# Altium PCB Twintig-FCC-Metacarpal.PcbDoc
Units mm, origin at the board's own origin, x right, y up, seen from the top; angles counter-clockwise.
Board outline 15 x 10 mm, 2 copper layers (Top Copper, Bottom Copper), stack 0.32 mm thick; 2 components, 20 nets, 44 pads, 20 vias.
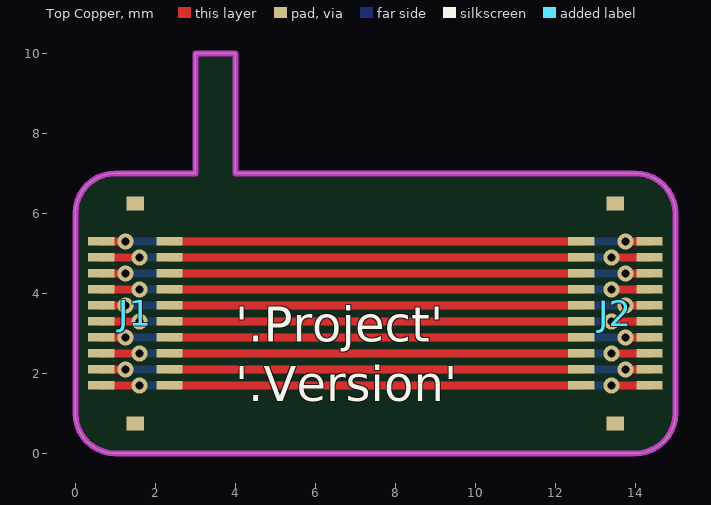
[diagram p0: Top Copper view]
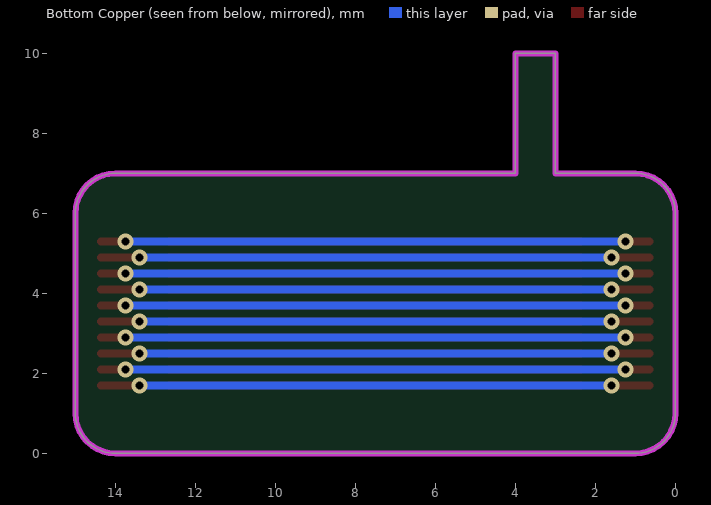
[diagram p1: Bottom Copper view, seen from below]

## Layer stack, top to bottom
Top Coverlay: solder mask 0.0125, FC-001, Dk 4
Top Adhesive: prepreg 0.015, PP-006, Dk 4.1
Top Copper: signal copper 0.035
Polyimide: core 0.025, Core-009, Dk 4.5
Bottom Copper: signal copper 0.035
Bottom Adhesive: prepreg 0.015, PP-006, Dk 4.1
Bottom Coverlay: solder mask 0.0125, FC-001, Dk 4
Stiffener: core 0.195, Core-009, Dk 4.5

## Board outline
3,0 14,0 ccw(c14,1) 15,1 15,6 ccw(c14,6) 14,7 4,7 4,10 3,10 3,7 1,7 ccw(c1,6) 0,6 0,1 ccw(c1,1) 1,0
board region "Layer Stack Region 1": 1,0 3,0 3,7 1,7 0.902,7 0.708,6.962 0.526,6.886 0.363,6.777 0.223,6.637 0.114,6.474 0.038,6.292 0,6.098 0,6 0,1 0,0.902 0.038,0.708 0.114,0.526 0.223,0.363 0.363,0.223 0.526,0.114 0.708,0.038 0.902,0
board region "Layer Stack Region 2": 15,1 15,6 15,6.098 14.962,6.292 14.886,6.474 14.777,6.637 14.637,6.777 14.474,6.886 14.292,6.962 14.098,7 14,7 12,7 12,0 14,0 14.098,0 14.292,0.038 14.474,0.114 14.637,0.223 14.777,0.363 14.886,0.526 14.962,0.708 15,0.902
board region "Default Layer Stack Region": 3,0 12,0 12,7 4,7 4,10 3,10 3,7

## Design rules (kind name [scope] priority, off if disabled: settings)
Clearance [All] p1: gap=0.1 ignorepadtopadclearanceinfootprint=FALSE except(0: Arc-Hole Track-Hole SMDPad-Hole THPad-Hole Via-Hole Fill-Hole Poly-Hole Region-Hole Text-Hole)
DiffPairsRouting [All] p1: maxlimit=0.254 minlimit=0.1 mostfreqgap=0.1 toplayer_minwidth=0.1 toplayer_maxwidth=0.381 toplayer_prefwidth=0.1 bottomlayer_minwidth=0.1 bottomlayer_maxwidth=0.381 bottomlayer_prefwidth=0.1 substack1={BC2B3772-545D-430F-81C9-78F2F459DFCE} toplayer_{bc2b3772-545d-430f-81c9-78f2f459dfce}_minwidth=0.381 toplayer_{bc2b3772-545d-430f-81c9-78f2f459dfce}_maxwidth=0.381 toplayer_{bc2b3772-545d-430f-81c9-78f2f459dfce}_prefwidth=0.381 bottomlayer_{bc2b3772-545d-430f-81c9-78f2f459dfce}_minwidth=0.381 bottomlayer_{bc2b3772-545d-430f-81c9-78f2f459dfce}_maxwidth=0.381 bottomlayer_{bc2b3772-545d-430f-81c9-78f2f459dfce}_prefwidth=0.381 maxuncoupledlength=12.7
HoleSize [All] p1: absolutevalues=TRUE maxlimit=10 minlimit=0.025 maxpercent=80.000 minpercent=20.000
MinimumSolderMaskSliver [All] p1: minsoldermaskwidth=0
PlaneClearance [All] p1: clearance=0.2
PlaneConnect [All] p1: planeconnectstyle=Direct reliefexpansion=0.508 reliefentries=4 reliefconductorwidth=0.254 reliefairgap=0.254
PolygonConnect [All] p1: thpad.connectstyle=Relief thpad.reliefconductorwidth=0.254 thpad.reliefentries=4 thpad.polygonreliefangle="90 Angle" thpad.airgapwidth=0.1 smdpad.connectstyle=Relief smdpad.reliefconductorwidth=0.254 smdpad.reliefentries=4 smdpad.polygonreliefangle="90 Angle" smdpad.airgapwidth=0.1 via.connectstyle=Direct via.reliefconductorwidth=0.254 via.reliefentries=4 via.polygonreliefangle="90 Angle" via.airgapwidth=0.254
RoutingVias [All] p1: holewidth=0.711 width=1.27 viastyle="Through Hole" minholewidth=0.15 minwidth=0.35 maxholewidth=0.711 maxwidth=1.27
SilkToSolderMaskClearance [IsPad] p1: minsilkscreentomaskgap=0.1 clearancetoexposedcopper=TRUE
SolderMaskExpansion [All] p1: expansion=0.102 istentingtop=FALSE
Width [All] p1: maxlimit=1 minlimit=0.05 preferedwidth=0.1 substack1={BC2B3772-545D-430F-81C9-78F2F459DFCE}
24 further rules are at their usual default settings.

## Components (designator, comment, footprint, x,y, rotation, side; value= is the part's Value field where it differs from the comment)
J1 "Molex 502430-2030" "MOLEX 502430-2030" 1.5,3.5 r90 top
J2 "Molex 502430-2030" "MOLEX 502430-2030" 13.5,3.5 r90 top

## Footprints (in the part's own frame and the unit in brackets; to place one, negate y for a bottom-side part, rotate by r counter-clockwise, add the part's x,y. Pads: shape width x height; smd on the part's side, far side on the other; paste and mask are expansions set on the pad)
"MOLEX 502430-2030" [mm]
  rect 0.22x0.66 smd: 1(-1.8,-0.855) 2(-1.4,-0.855) 3(-1,-0.855) 4(-0.6,-0.855) 5(-0.2,-0.855) 6(0.2,-0.855) 7(0.6,-0.855) 8(1,-0.855) 9(1.4,-0.855) 10(1.8,-0.855) 11(-1.8,0.855) 12(-1.4,0.855) 13(-1,0.855) 14(-0.6,0.855) 15(-0.2,0.855) 16(0.2,0.855) 17(0.6,0.855) 18(1,0.855) 19(1.4,0.855) 20(1.8,0.855)
  rect 0.35x0.44 smd: "Fitting Nail"(-2.75,0) "Fitting Nail"(2.75,0)
  body extent -3.13,-1.04 3.13,1.04, height 0.78

## Via types
v1: diameter 0.4, hole 0.2, Top Copper to Bottom Copper, tented both sides, 20 vias

## Nets (pads, with @x,y where several pads share a name; then routed paths per layer and width w, separated by ;. In a path a pad name is that pad's centre, name@x,y a point inside that pad or via, vN(x,y) a via of type N, cw(c..) or ccw(c..) an arc to the next point about the centre after c; other vN are vias at no path point)
1: J1.1 J2.11 | length 10.3
  Top Copper w0.2: J1.1 J2.11
2: J1.2 J2.12 | length 10.3
  Top Copper w0.2: J1.2 J2.12
3: J1.3 J2.13 | length 10.3
  Top Copper w0.2: J1.3 J2.13
4: J1.4 J2.14 | length 10.3
  Top Copper w0.2: J1.4 J2.14
5: J1.5 J2.15 | length 10.3
  Top Copper w0.2: J1.5 J2.15
6: J1.6 J2.16 | length 10.3
  Top Copper w0.2: J1.6 J2.16
7: J1.7 J2.17 | length 10.3
  Top Copper w0.2: J1.7 J2.17
8: J1.8 J2.18 | length 10.3
  Top Copper w0.2: J1.8 J2.18
9: J1.9 J2.19 | length 10.3
  Top Copper w0.2: J1.9 J2.19
10: J1.10 J2.20 | length 10.3
  Top Copper w0.2: J1.10 J2.20
11: J1.11 J2.1 | length 13.7
  Top Copper w0.2: J1.11 v1(1.6,1.7) ; v1(13.4,1.7) J2.1
  Bottom Copper w0.2: v1(1.6,1.7) v1(13.4,1.7)
12: J1.12 J2.2 | length 13.7
  Top Copper w0.2: J1.12 v1(1.25,2.1) ; v1(13.75,2.1) J2.2
  Bottom Copper w0.2: v1(1.25,2.1) v1(13.75,2.1)
13: J1.13 J2.3 | length 13.7
  Top Copper w0.2: J1.13 v1(1.6,2.5) ; v1(13.4,2.5) J2.3
  Bottom Copper w0.2: v1(1.6,2.5) v1(13.4,2.5)
14: J1.14 J2.4 | length 13.7
  Top Copper w0.2: J1.14 v1(1.25,2.9) ; v1(13.75,2.9) J2.4
  Bottom Copper w0.2: v1(1.25,2.9) v1(13.75,2.9)
15: J1.15 J2.5 | length 13.7
  Top Copper w0.2: J1.15 v1(1.6,3.3) ; v1(13.4,3.3) J2.5
  Bottom Copper w0.2: v1(1.6,3.3) v1(13.4,3.3)
16: J1.16 J2.6 | length 13.7
  Top Copper w0.2: J1.16 v1(1.25,3.7) ; v1(13.75,3.7) J2.6
  Bottom Copper w0.2: v1(1.25,3.7) v1(13.75,3.7)
17: J1.17 J2.7 | length 13.7
  Top Copper w0.2: J1.17 v1(1.6,4.1) ; v1(13.4,4.1) J2.7
  Bottom Copper w0.2: v1(1.6,4.1) v1(13.4,4.1)
18: J1.18 J2.8 | length 13.7
  Top Copper w0.2: J1.18 v1(1.25,4.5) ; v1(13.75,4.5) J2.8
  Bottom Copper w0.2: v1(1.25,4.5) v1(13.75,4.5)
19: J1.19 J2.9 | length 13.7
  Top Copper w0.2: J1.19 v1(1.6,4.9) ; v1(13.4,4.9) J2.9
  Bottom Copper w0.2: v1(1.6,4.9) v1(13.4,4.9)
20: J1.20 J2.10 | length 13.7
  Top Copper w0.2: J1.20 v1(1.25,5.3) ; v1(13.75,5.3) J2.10
  Bottom Copper w0.2: v1(1.25,5.3) v1(13.75,5.3)
pads on no net: "J1.Fitting Nail" "J2.Fitting Nail"

## Polygon pours and split planes (outlines as drawn)
no net on Mechanical 1 "NONET_L-01_P-001" (solid): 14,7 cw(c14,6) 15,6 15,1 cw(c14,1) 14,0 12,0 12,7
no net on Mechanical 1 "NONET_L-01_P-001" (solid): 1,0 cw(c1,1) 0,1 0,6 cw(c1,6) 1,7 3,7 3,0
no net on Layer0 "Default Coverlay 1 Top" (split plane): 1.002,0 3,0 3,7 1.002,7 0.904,7 0.71,6.961 0.528,6.886 0.363,6.776 0.224,6.637 0.114,6.472 0.039,6.29 0,6.096 0,0.904 0.039,0.71 0.114,0.528 0.224,0.363 0.363,0.224 0.528,0.114 0.71,0.039 0.904,0 1.002,0
no net on Layer0 "Default Coverlay 1 Top" (split plane): 12,7 12,0 14.116,0 14.306,0.038 14.484,0.112 14.645,0.219 14.781,0.355 14.888,0.516 14.962,0.694 15,0.884 15,0.98 15,6 15,6.116 14.962,6.306 14.888,6.484 14.781,6.645 14.645,6.781 14.484,6.888 14.306,6.962 14.116,7
no net on Layer0 "Default Coverlay 1 Bottom" (split plane): 1.002,0 3,0 3,7 1.002,7 0.904,7 0.71,6.961 0.528,6.886 0.363,6.776 0.224,6.637 0.114,6.472 0.039,6.29 0,6.096 0,0.904 0.039,0.71 0.114,0.528 0.224,0.363 0.363,0.224 0.528,0.114 0.71,0.039 0.904,0 1.002,0
no net on Layer0 "Default Coverlay 1 Bottom" (split plane): 12,7 12,0 14.116,0 14.306,0.038 14.484,0.112 14.645,0.219 14.781,0.355 14.888,0.516 14.962,0.694 15,0.884 15,0.98 15,6 15,6.116 14.962,6.306 14.888,6.484 14.781,6.645 14.645,6.781 14.484,6.888 14.306,6.962 14.116,7
no net on Layer0 "Default Coverlay 2 Top" (split plane): 3,0 12,0 12,7 4,7 4,10 3,10
no net on Layer0 "Default Coverlay 2 Bottom" (split plane): 3,0 12,0 12,7 4,7 4,10 3,10

## Keep-outs
Keep-Out Layer:
  lines w0.15: 0,1 ccw(c1,1) 1,0 14,0 ccw(c14,1) 15,1 15,6 ccw(c14,6) 14,7 4,7 4,10 3,10 3,7 1,7 ccw(c1,6) 0,6 0,1

## Silkscreen, mask and mechanical layers (free items; w line width, h text height)
Top Overlay:
  text "'.Project'" at 4,2.5 h1.5
  text "'.Version'" at 4,1.017 h1.5